# EAGLE board electrobassrev6 (EAGLE 9.6.2), part 1 of 2
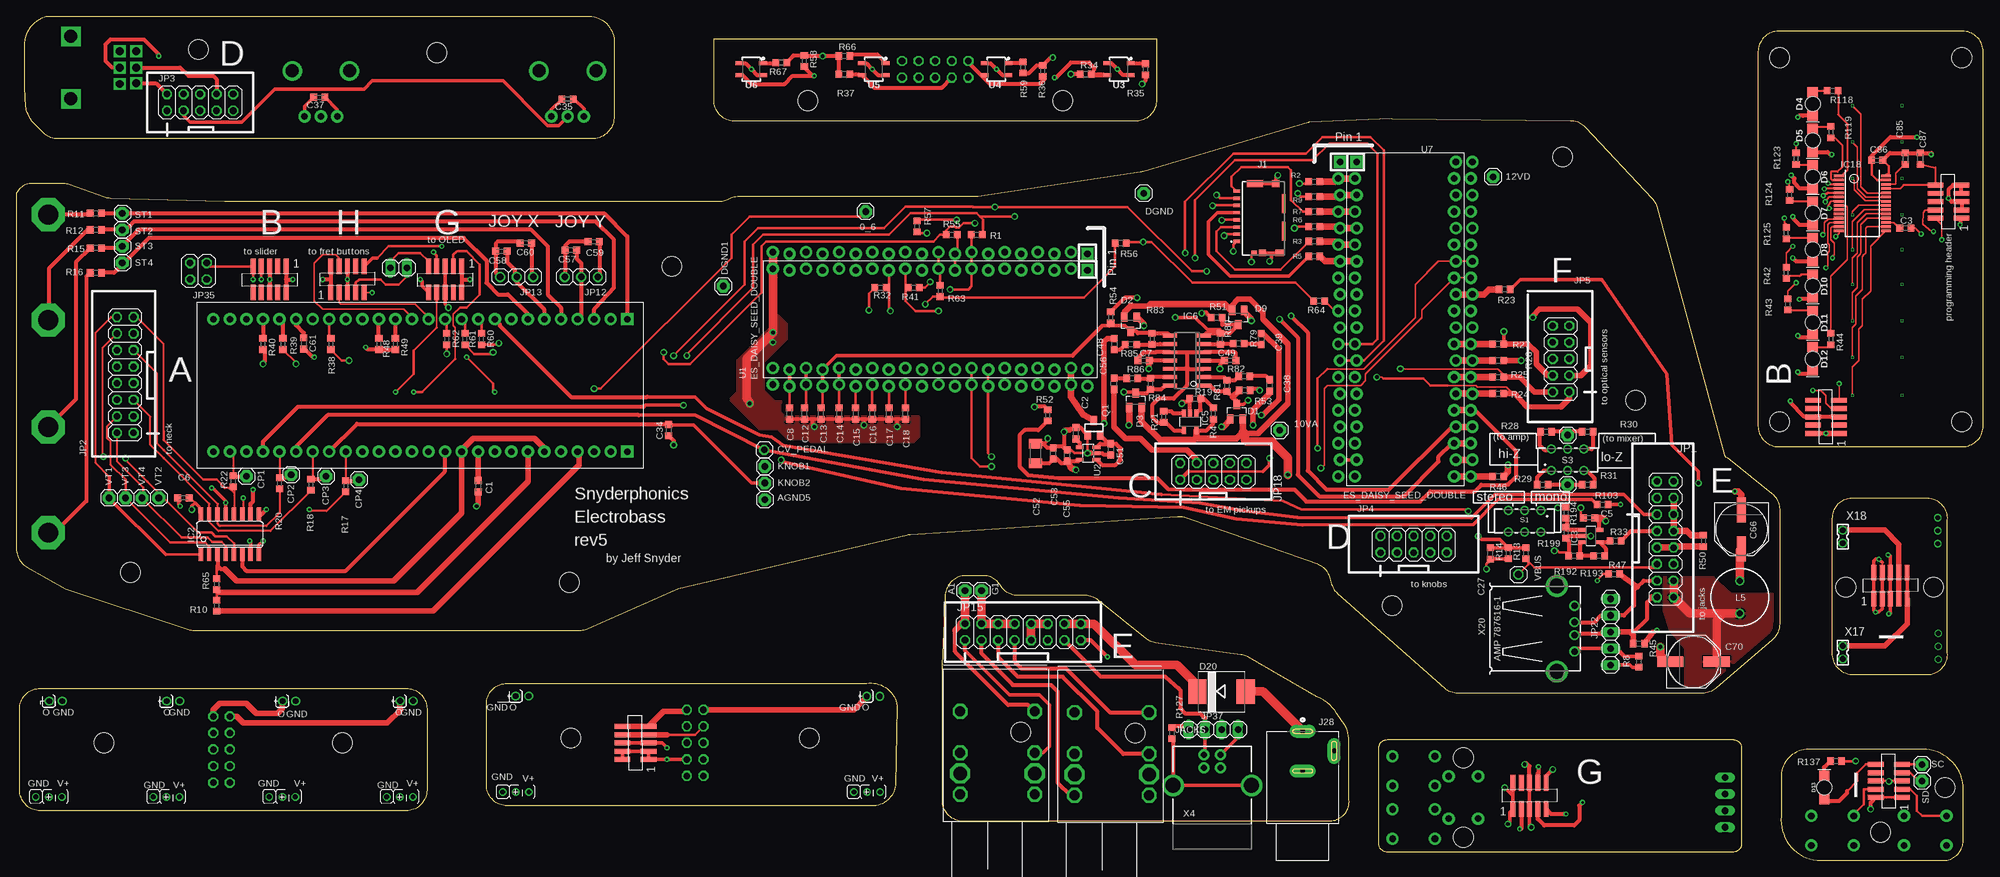
[diagram p0: board, top side]
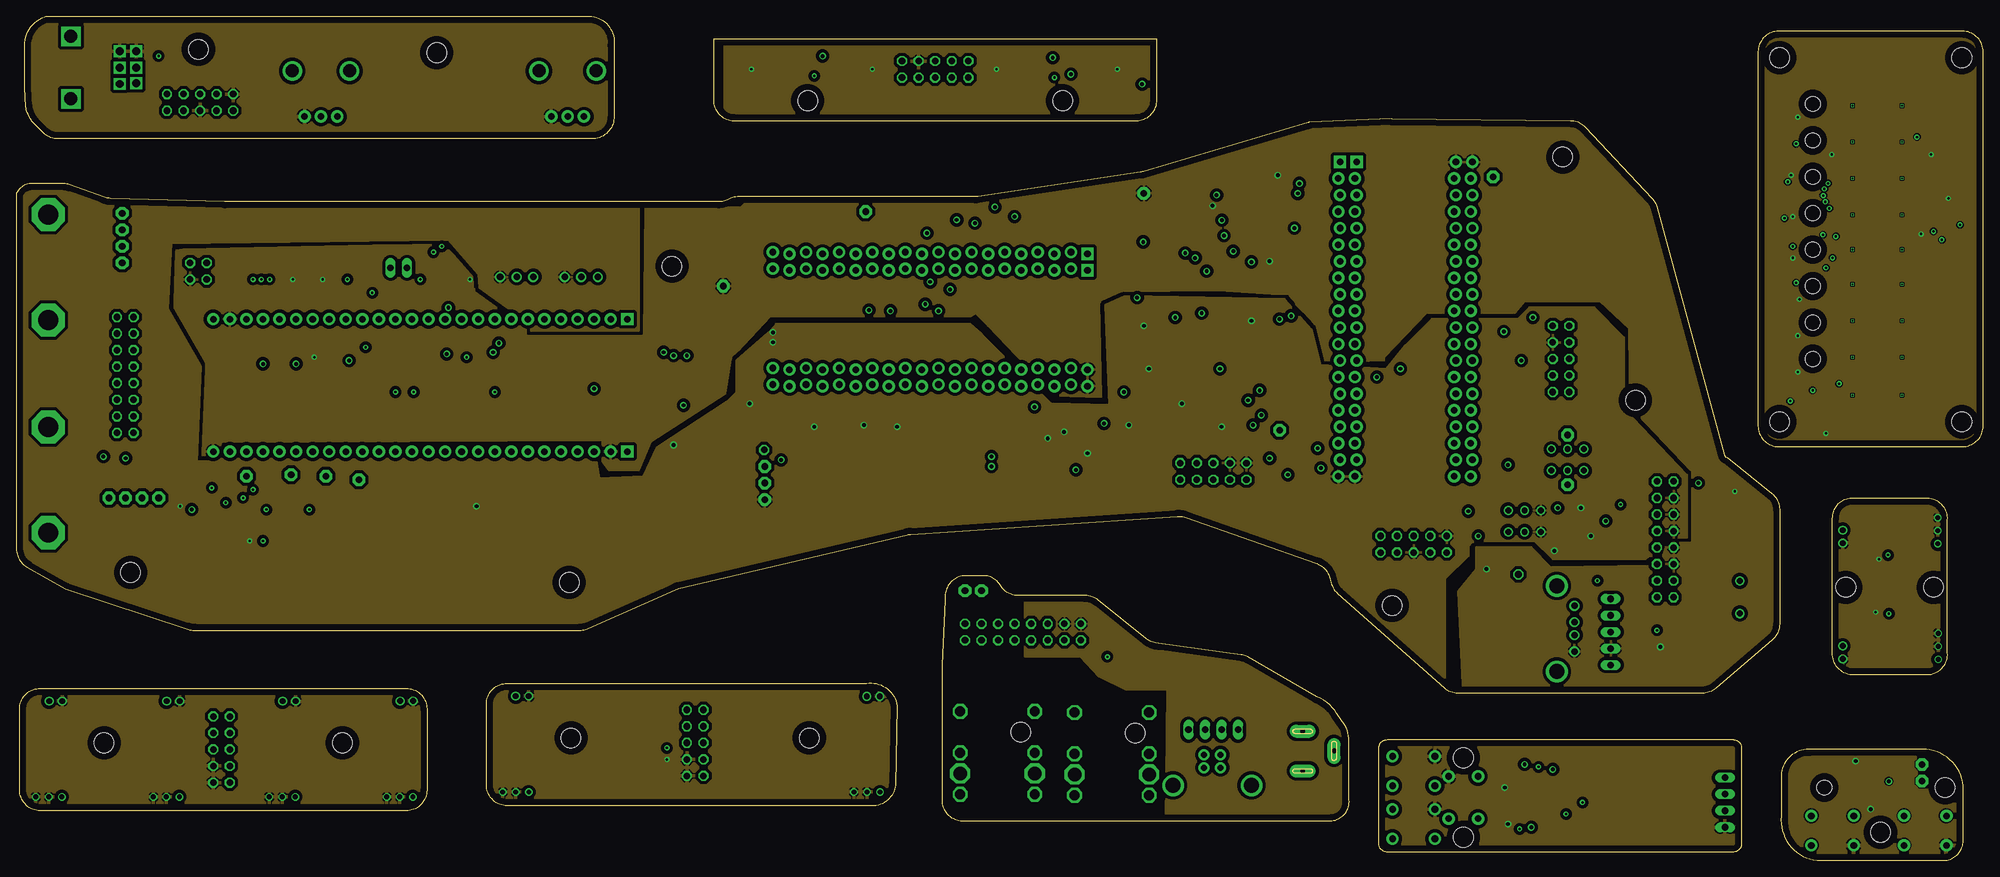
[diagram p1: board, inner layer Route2]
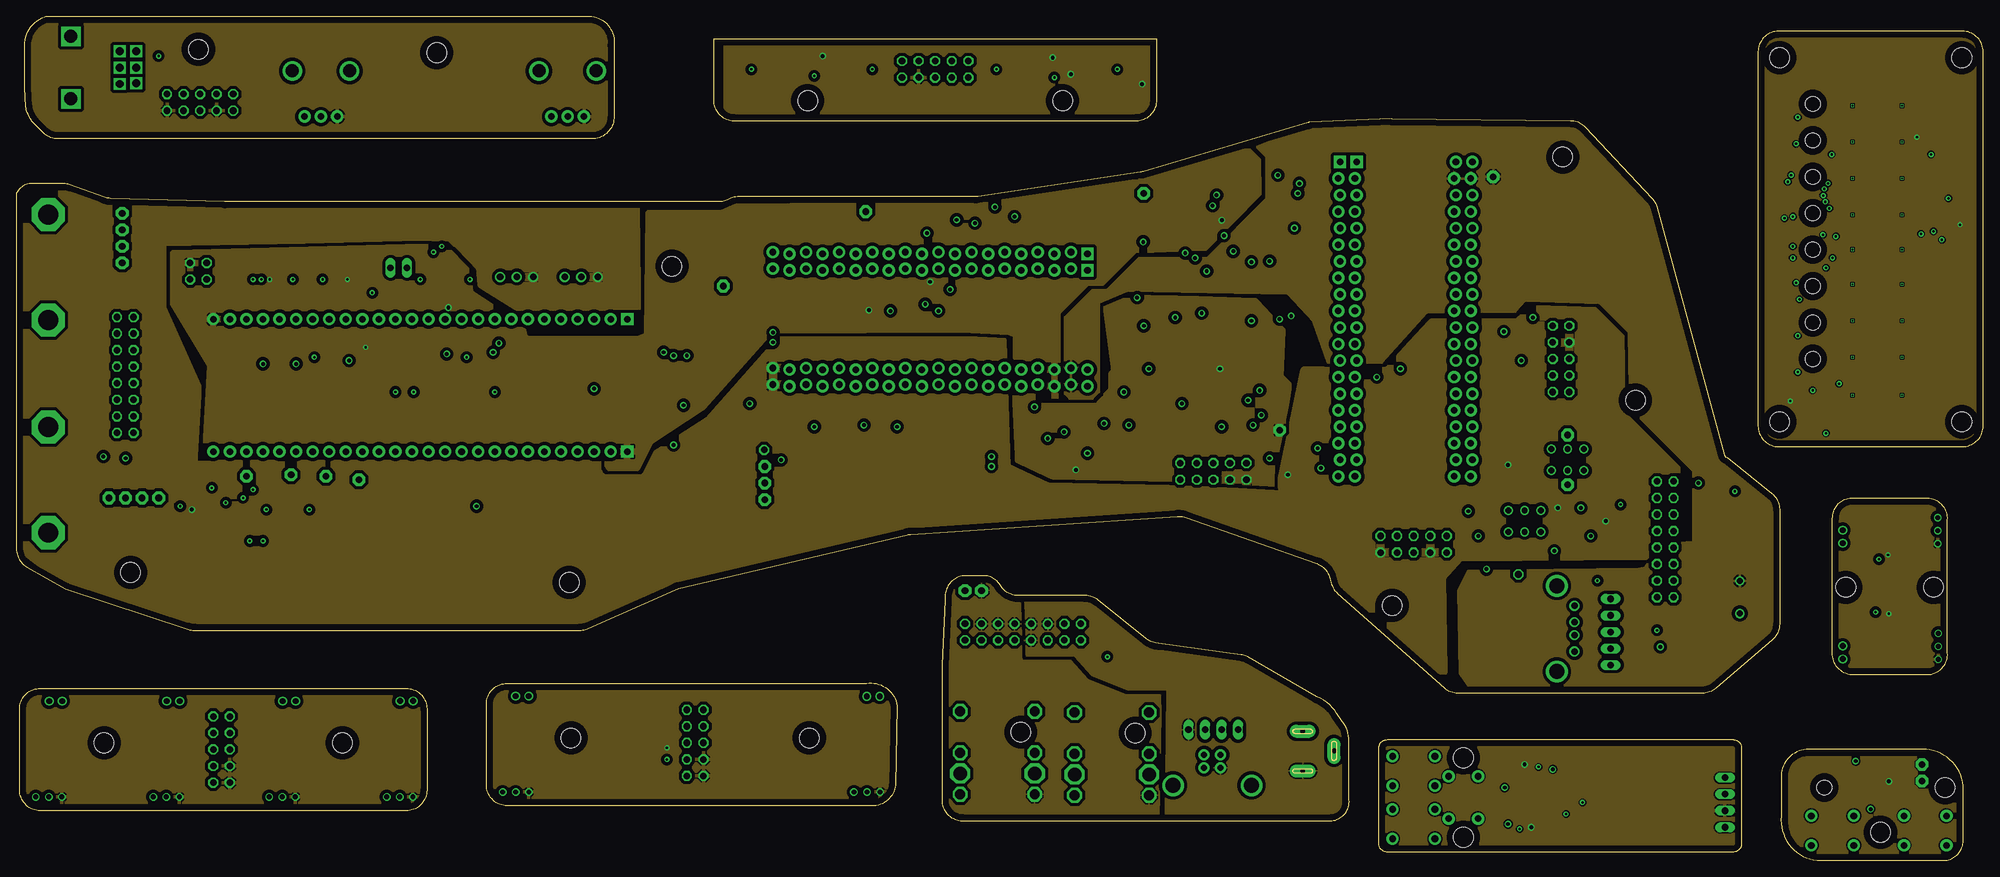
[diagram p2: board, inner layer Route15]
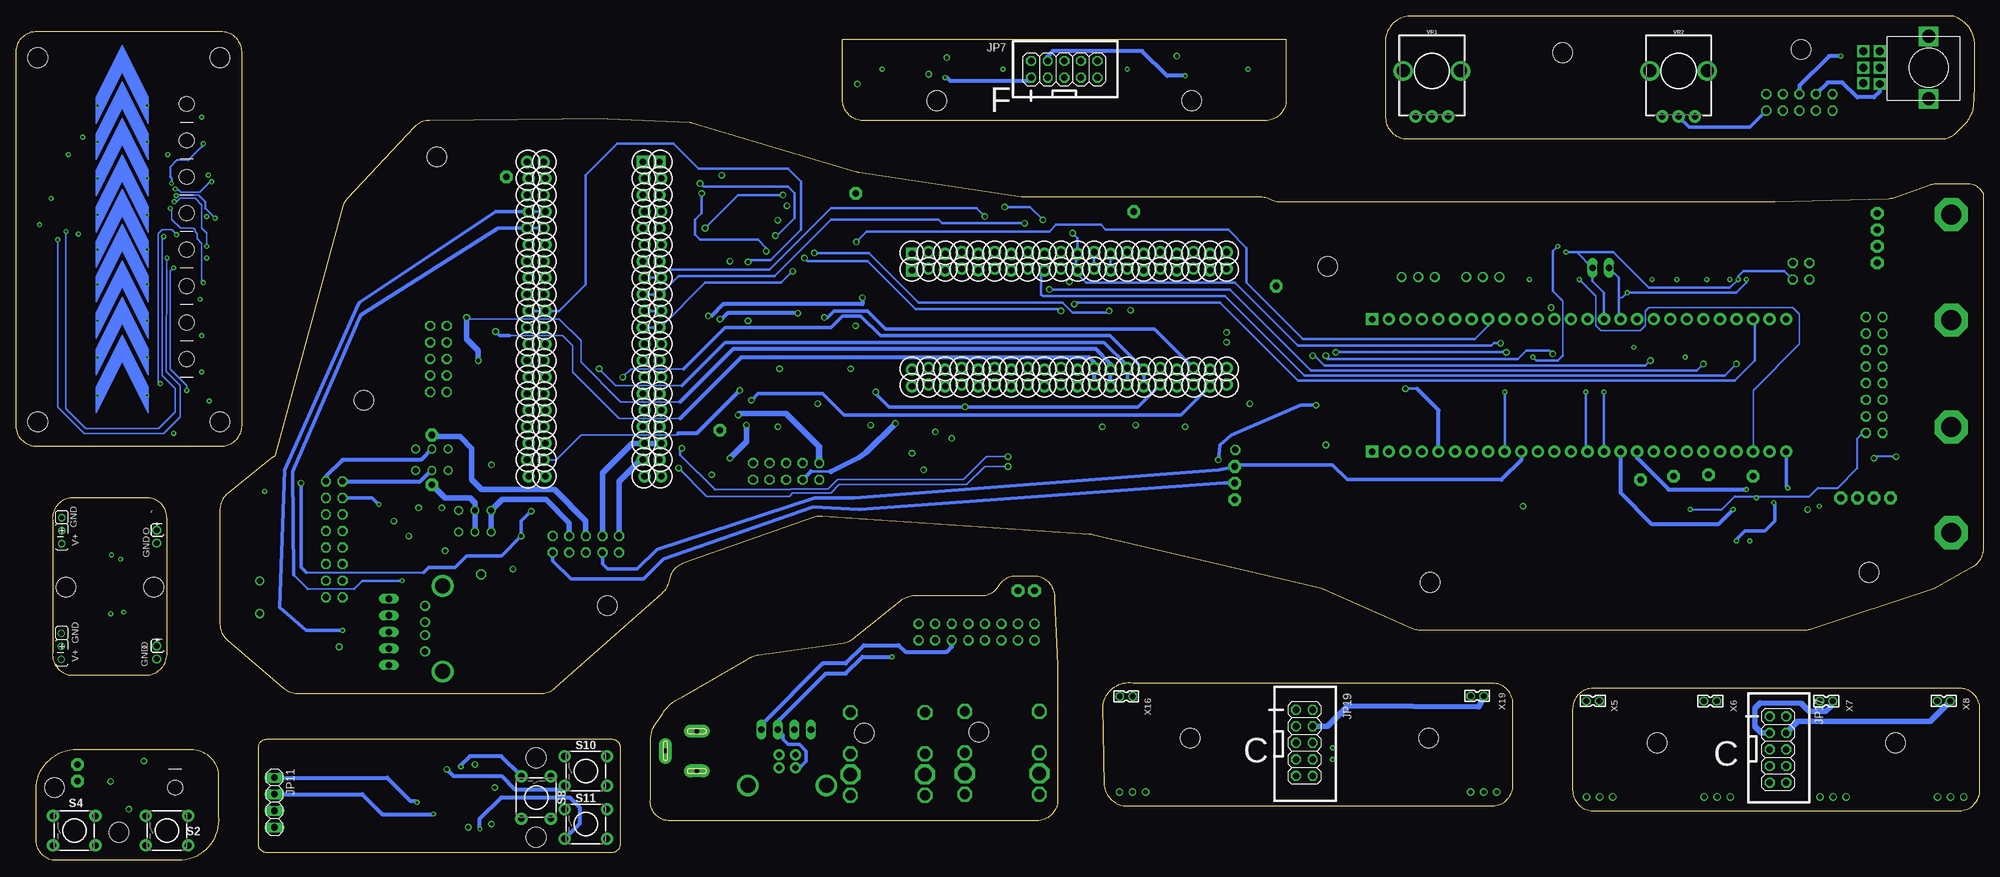
[diagram p3: board, bottom side, seen from below]

Size 301.75 x 129.54 mm. Coordinates in mm from the lower left corner, seen from the top.
Outline: 0,102.36 0,47.82 arc60 1.61,45.06 7.62,41.66 26.44,35.46 arc18 27.43,35.31 86.45,35.31 arc24 87.74,35.58 101.07,41.53 arc-11 101.64,41.73 136.64,49.98 arc-10 137.18,50.05 178.16,52.79 arc-23 179.43,52.62 199.52,45.54 arc-58 201.56,43.26 201.7,42.64 arc35 202.69,40.98 219.06,26.45 arc42 221.17,25.65 258.67,25.65 arc41 260.73,26.42 269.4,33.85 arc49 270.51,36.26 270.51,53.85 arc51 269.33,56.33 262.9,61.51 arc12 262.33,61.88 arc-48 262.07,62.19 251.67,100.33 arc28 250.92,101.67 240.7,112.55 arc46 238.42,113.55 211.07,113.79 198.37,113.28 arc-9 198.13,113.21 172.93,105.73 arc-8 172.5,105.63 147.55,101.89 arc-9 147.08,101.85 110.89,101.85 arc23 109.64,101.6 109.06,101.35 arc-23 107.81,101.09 32,101.09 14.48,101.59 arc-18 13.49,101.77 8.14,103.7 arc20 7.07,103.89 2.47,103.89 arc63 0,102.36
Outline: 298.58,127.25 270.38,127.25 arc90 267.21,124.08 267.21,66.67 arc90 270.38,63.5 298.58,63.5 arc90 301.75,66.67 301.75,124.08 arc90 298.58,127.25
Outline: 291.85,17.02 275,17.02 arc90 270.76,13.03 270.76,6.78 arc90 276.27,0 295.66,0 arc90 298.7,3.05 298.7,11.43 arc90 291.85,17.02
Outline: 110.11,113.54 171.83,113.54 arc90 175.01,116.71 175.01,125.98 106.93,125.98 106.93,116.71 arc90 110.11,113.54
Outline: 4.62,129.52 88.27,129.54 arc-90 91.69,125.09 91.69,113.92 arc-90 88.27,110.74 6.39,110.74 arc-45 4.15,111.67 2.65,113.17 arc-18 2.06,114 1.81,114.5 arc-22 1.48,115.69 1.27,118.62 1.27,125.03 arc-70 4.38,129.49 4.53,129.53 arc-20 4.62,129.52
Outline: 210.31,18.54 263.4,18.54 arc-90 264.67,17.27 264.67,2.54 arc-90 263.4,1.27 210.31,1.27 arc-90 209.04,2.54 209.04,17.27 arc-90 210.31,18.54
Outline: 142.49,39.88 141.99,29.97 141.99,9.27 arc90 145.16,6.1 201.8,6.1 arc90 204.47,9.27 204.47,18.27 arc28 203.85,20.76 202.63,22.52 arc34 199.56,25.1 188.98,31.21 arc21 187.89,31.57 175.26,33.27 174.75,33.38 arc-27 173.39,34.01 165.97,39.94 arc39 163.99,40.64 153.72,40.64 arc-60 150.97,42.22 arc60 148.41,43.69 145.67,43.69 arc90 142.49,40.51 142.49,39.88
Outline: 130.94,8.38 75.31,8.38 arc-90 72.14,11.56 72.14,24 arc-90 75.31,27.18 130.43,27.18 arc-90 135.13,23.75 134.87,11.56 arc-90 130.94,8.38
Outline: 278.64,32.13 278.64,52.45 arc-90 281.56,55.63 293.5,55.63 arc-90 296.16,51.94 296.16,32.13 arc-90 293.5,28.45 281.56,28.45 arc-90 278.64,32.13
Outline: 59.82,7.62 3.68,7.62 arc-90 0.51,10.79 0.51,23.24 arc-90 3.68,26.42 59.82,26.42 arc-90 62.99,23.24 62.99,10.79 arc-90 59.82,7.62
Copper layers (1+2*15+16): Top 0.035mm / dielectric 1.5mm / Route2 0.035mm / dielectric 0.15mm / Route15 0.035mm / dielectric 0.2mm / Bottom 0.035mm
Design rules "default *": minimum track width 8mil, minimum drill 12mil, track to track 8mil, track to pad 8mil, pad to pad 8mil, via to via 8mil, smd to smd 8mil, copper to edge 40mil, drill to drill 8mil, minimum pad ring 1mil, minimum via ring 8mil, stop-mask expansion 1mil, vias tented up to drill 0mil, thermal gap 10mil
Holes 3.05 mm at 84.84,42.67 17.53,44.2 100.58,91.19 211.07,39.12 237.24,107.95 248.41,70.61 298.45,123.19 298.45,67.31 270.51,67.31 270.51,123.19 286,4.32 295.91,11.18 121.41,116.59 160.53,116.59 64.52,123.95 27.94,124.46 222,15.75 222,3.56 85.09,18.8 121.67,18.8 294.13,41.91 280.67,41.91 13.46,18.03 50.04,18.03

## Footprints (pad centres in the part's own frame; a part is rotated, then mirrored left to right if it is on the bottom)
1X01 = drill 1.016 pad 1.93 octagon: 1 0,0
C0603K = smd 1.05 x 1.08: 1 -0.875,0; 2 0.875,0
C0603 = smd 1.1 x 1: 1 -0.85,0; 2 0.85,0
C1206K = smd 1.5 x 2: 1 -1.5,0; 2 1.5,0
PANASONIC_E = smd 3.8 x 1.4: + 3,0; - -3,0
PANASONIC_F = smd 4 x 1.6: + 3.55,0; - -3.55,0
1X01' = drill 1.016 octagon: 1 0,0
SOT23 = smd 1 x 1.4: 1 -0.95,-1.1; 2 0.95,-1.1; 3 0,1.1
LED-1206-BOTTOM = smd 1.5 x 1.6: A -1.8,0; C 1.8,0 | hole 2.3: 0,0
SMC = smd 2.8 x 3.8: A 3.7,0; C -3.7,0
SO16 = smd 0.66 x 2.032: 1 -4.445,-3.073; 2 -3.175,-3.073; 3 -1.905,-3.073; 4 -0.635,-3.073; 5 0.635,-3.073; 6 1.905,-3.073; 7 3.175,-3.073; 8 4.445,-3.073; 9 4.445,3.073; 10 3.175,3.073; 11 1.905,3.073; 12 0.635,3.073; 13 -0.635,3.073; 14 -1.905,3.073; 15 -3.175,3.073; 16 -4.445,3.073
SOT23-5 = smd 0.6 x 1.2: 1 -0.95,-1.306; 2 0,-1.306; 3 0.95,-1.306; 4 0.95,1.306; 5 -0.95,1.306
SO14 = smd 0.6 x 2.2: 1 -3.81,-2.6; 2 -2.54,-2.6; 3 -1.27,-2.6; 4 0,-2.6; 5 1.27,-2.6; 6 2.54,-2.6; 7 3.81,-2.6; 8 3.81,2.6; 9 2.54,2.6; 10 1.27,2.6; 11 0,2.6; 12 -1.27,2.6; 13 -2.54,2.6; 14 -3.81,2.6
SSOP28 = smd 0.4 x 1.5: 1 -4.225,-3.625; 2 -3.575,-3.625; 3 -2.925,-3.625; 4 -2.275,-3.625; 5 -1.625,-3.625; 6 -0.975,-3.625; 7 -0.325,-3.625; 8 0.325,-3.625; 9 0.975,-3.625; 10 1.625,-3.625; 11 2.275,-3.625; 12 2.925,-3.625; 13 3.575,-3.625; 14 4.225,-3.625; 15 4.225,3.625; 16 3.575,3.625; 17 2.925,3.625; 18 2.275,3.625; 19 1.625,3.625; 20 0.975,3.625; 21 0.325,3.625; 22 -0.325,3.625; 23 -0.975,3.625; 24 -1.625,3.625; 25 -2.275,3.625; 26 -2.925,3.625; 27 -3.575,3.625; 28 -4.225,3.625
105162-0001 = smd 0.5 x 1: 1 3.55,-7.34; 2 2.45,-7.34; 3 1.35,-7.34; 4 0.25,-7.34; 5 -0.85,-7.34; 6 -1.95,-7.34; 7 -3.05,-7.34; 8 -4.15,-7.34 | smd 0.72 x 0.78: 9 5.31,-4.66 | smd 1.05 x 1.08: 10 5.325,-3.39 | smd 1.05 x 1.2: 11 5.325,-0.78; 12 -5.325,-1.35 | smd 1.05 x 2.39: 13 -5.325,-4.535 | smd 2.91 x 0.55: 14 1.986,-0.105; 15 -2.204,-0.105
CUI_PJ-066A = drill 0.7 pad 2 long: 1 0,0; 2 6.1,0; 3 3,4.8
2X08 = drill 1.016 octagon: 1 -8.89,-1.27; 2 -8.89,1.27; 3 -6.35,-1.27; 4 -6.35,1.27; 5 -3.81,-1.27; 6 -3.81,1.27; 7 -1.27,-1.27; 8 -1.27,1.27; 9 1.27,-1.27; 10 1.27,1.27; 11 3.81,-1.27; 12 3.81,1.27; 13 6.35,-1.27; 14 6.35,1.27; 15 8.89,-1.27; 16 8.89,1.27
2X05 = drill 1.016 octagon: 1 -5.08,-1.27; 2 -5.08,1.27; 3 -2.54,-1.27; 4 -2.54,1.27; 5 0,-1.27; 6 0,1.27; 7 2.54,-1.27; 8 2.54,1.27; 9 5.08,-1.27; 10 5.08,1.27
20021121 = smd 0.76 x 2.4: 1 -2.54,-2; 2 -2.54,2; 3 -1.27,-2; 4 -1.27,2; 5 0,-2; 6 0,2; 7 1.27,-2; 8 1.27,2; 9 2.54,-2; 10 2.54,2
1X04 = drill 1.016 long: 1 -3.81,0; 2 -1.27,0; 3 1.27,0; 4 3.81,0
1X03 = drill 1.016: 1 -2.54,0; 2 0,0; 3 2.54,0
1X05 = drill 1.016 long: 1 -5.08,0; 2 -2.54,0; 3 0,0; 4 2.54,0; 5 5.08,0
1X02 = drill 1.016 long: 1 -1.27,0; 2 1.27,0
2X02 = drill 1.016 octagon: 1 -1.27,-1.27; 2 -1.27,1.27; 3 1.27,-1.27; 4 1.27,1.27
6000-XXXX-RC = drill 0.9 pad 1.422: 1 -2.5,0; 2 2.5,0
SUPER-SOT3 = smd 1 x 1.4: 1 -0.95,-1.1; 2 0.95,-1.1; 3 0,1.1
R0603 = smd 1 x 1.1: 1 -0.85,0; 2 0.85,0
452404020202 = drill 0.9: 1 2.5,1.65; 2 0,1.65; 3 -2.5,1.65; 4 2.5,-1.65; 5 0,-1.65; 6 -2.5,-1.65
TACTILE_SWITCH_PTH_6.0MM = drill 1.016 pad 1.88: 1 -3.251,2.261; 2 3.251,2.261; 3 -3.251,-2.261; 4 3.251,-2.261
ES_DAISY_SEED_DOUBLE = drill 1.016 pad 1.88 square: 1 -7.493,24.13; B1 -10.033,24.13 | drill 1.016 pad 1.88: 2 -7.747,21.59; 3 -7.493,19.05; 4 -7.747,16.51; 5 -7.493,13.97; 6 -7.747,11.43; 7 -7.493,8.89; 8 -7.747,6.35; 9 -7.493,3.81; 10 -7.747,1.27; 11 -7.493,-1.27; 12 -7.747,-3.81; 13 -7.493,-6.35; 14 -7.747,-8.89; 15 -7.493,-11.43; 16 -7.747,-13.97; 17 -7.493,-16.51; 18 -7.747,-19.05; 19 -7.493,-21.59; 20 -7.747,-24.13; 21 7.493,-24.13; 22 7.747,-21.59; 23 7.493,-19.05; 24 7.747,-16.51; 25 7.493,-13.97; 26 7.747,-11.43; 27 7.493,-8.89; 28 7.747,-6.35; 29 7.493,-3.81; 30 7.747,-1.27; 31 7.493,1.27; 32 7.747,3.81; 33 7.493,6.35; 34 7.747,8.89; 35 7.493,11.43; 36 7.747,13.97; 37 7.493,16.51; 38 7.747,19.05; 39 7.493,21.59; 40 7.747,24.13; B2 -10.287,21.59; B3 -10.033,19.05; B4 -10.287,16.51; B5 -10.033,13.97; B6 -10.287,11.43; B7 -10.033,8.89; B8 -10.287,6.35; B9 -10.033,3.81; B10 -10.287,1.27; B11 -10.033,-1.27; B12 -10.287,-3.81; B13 -10.033,-6.35; B14 -10.287,-8.89; B15 -10.033,-11.43; B16 -10.287,-13.97; B17 -10.033,-16.51; B18 -10.287,-19.05; B19 -10.033,-21.59; B20 -10.287,-24.13; B21 10.033,-24.13; B22 10.287,-21.59; B23 10.033,-19.05; B24 10.287,-16.51; B25 10.033,-13.97; B26 10.287,-11.43; B27 10.033,-8.89; B28 10.287,-6.35; B29 10.033,-3.81; B30 10.287,-1.27; B31 10.033,1.27; B32 10.287,3.81; B33 10.033,6.35; B34 10.287,8.89; B35 10.033,11.43; B36 10.287,13.97; B37 10.033,16.51; B38 10.287,19.05; B39 10.033,21.59; B40 10.287,24.13
SOT25 = smd 0.55 x 1.2: 1 -0.95,-1.3; 2 0,-1.3; 3 0.95,-1.3; 4 0.95,1.3; 5 -0.95,1.3
QRE1113 = smd 1.2 x 0.6: 1 -1.8,-0.9; 2 1.8,-0.9; 3 1.8,0.9; 4 -1.8,0.9
SLIDERS_SLIDER-SEGMENT3 = drill 0.254 pad 0.406 square: P$1 -1.27,3.81; P$2 -1.27,-3.81
PN092 = drill 2 square: P$1 -4.8,0; P$2 4.8,0 | drill 1.2 square: P$3 -2.5,-7.5; P$4 0,-7.5; P$5 2.5,-7.5; P$6 -2.5,-10; P$7 0,-10; P$8 2.4,-10
CY8CKIT-059_TARGET_3 = drill 1.016 pad 1.876 square: 1 30.48,8.89; 27 30.48,-11.43 | drill 1.016 pad 1.876: 2 27.94,8.89; 3 25.4,8.89; 4 22.86,8.89; 5 20.32,8.89; 6 17.78,8.89; 7 15.24,8.89; 8 12.7,8.89; 9 10.16,8.89; 10 7.62,8.89; 11 5.08,8.89; 12 2.54,8.89; 13 0,8.89; 14 -2.54,8.89; 15 -5.08,8.89; 16 -7.62,8.89; 17 -10.16,8.89; 18 -12.7,8.89; 19 -15.24,8.89; 20 -17.78,8.89; 21 -20.32,8.89; 22 -22.86,8.89; 23 -25.4,8.89; 24 -27.94,8.89; 25 -30.48,8.89; 26 -33.02,8.89; 28 27.94,-11.43; 29 25.4,-11.43; 30 22.86,-11.43; 31 20.32,-11.43; 32 17.78,-11.43; 33 15.24,-11.43; 34 12.7,-11.43; 35 10.16,-11.43; 36 7.62,-11.43; 37 5.08,-11.43; 38 2.54,-11.43; 39 0,-11.43; 40 -2.54,-11.43; 41 -5.08,-11.43; 42 -7.62,-11.43; 43 -10.16,-11.43; 44 -12.7,-11.43; 45 -15.24,-11.43; 46 -17.78,-11.43; 47 -20.32,-11.43; 48 -22.86,-11.43; 49 -25.4,-11.43; 50 -27.94,-11.43; 51 -30.48,-11.43; 52 -33.02,-11.43
STRING_HOLDER = drill 3.048 pad 5.08 octagon: P$1 0,0
POT-PTH-ALPS-KIT = drill 1 pad 1.88: P$1 7,-2.5; P$2 7,0; P$3 7,2.5 | drill 2: P$4 0,-4.4; P$5 0,4.4
3P-2MM-TH = drill 0.75: P$1 -2,0; P$2 0,0; P$3 2,0
NRJ6HF2 = drill 2.057 octagon: POST1 -7.442,0; POST2 -7.442,-11.43 | drill 1.524 octagon: R -10.6,0; RN -10.6,-11.43; S -4.25,0; SN -4.25,-11.43; T -16.942,0; TN -16.942,-11.43 | hole 2.997: -13.792,-2.134
USB-B-PTH = drill 0.914 pad 1.676: D+ 0,1.25; D- 1.981,1.25; GND 0,-1.25; VBUS 1.981,-1.25 | drill 2.286: S1 -2.718,-6.02; S2 -2.718,6.02
332-02 = drill 0.9 pad 1.27: 1 0,-1; 2 0,1
GHI2_USB_HOST_HORIZONTAL_W/CHASSIS_GND = drill 1: 1 -3.5,12.99; 2 -1,12.99; 3 1,12.99; 4 3.5,12.99 | drill 2.3: 5 -6.57,10.28; 6 6.57,10.28

## Placement (x,y rotation side)
0_6  [1X01]  130.3,99.57 180 top
10VA  [1X01]  193.8,66.04 90 top
12VD  [1X01]  226.57,104.9 270 top
A1  [1X01]  145.54,41.4 0 top
AGND5  [1X01]  114.81,55.37 0 top
AUDIO_OUT_L_POSTVOL  [1X01]  238,65.28 0 top
AUDIO_OUT_R_POSTVOL  [1X01]  238,57.66 0 top
C1  .01uf  [C0603K]  70.87,57.4 270 top
C2  .01uf  [C0603K]  162.56,65.53 90 top
C3  2200pf  [C0603K]  289.81,97.03 0 top
C5  .1uf  [C0603K]  241.3,52.58 180 top
C6  .1uf  [C0603K]  25.65,55.63 180 top
C7  .1uf  [C0603K]  172.97,76.71 0 top
C8  .01uf  [C0603K]  118.62,68.58 270 top
C12  .01uf  [C0603K]  120.9,68.58 270 top
C13  .01uf  [C0603K]  123.44,68.58 270 top
C14  .01uf  [C0603K]  126.24,68.58 270 top
C15  .01uf  [C0603K]  128.78,68.58 270 top
C16  .01uf  [C0603K]  131.32,68.58 270 top
C17  .01uf  [C0603K]  133.86,68.58 270 top
C18  .01uf  [C0603K]  136.4,68.58 270 top
C27  .1uf  [C0603K]  226.12,47.1 270 top
C34  .01uf  [C0603K]  100.08,66.04 270 top
C35  .1uf  [C0603K]  84.58,116.84 180 top
C37  .1uf  [C0603K]  46.48,117.09 180 top
C38  1uf  [C0603]  192.28,72.9 90 top
C39  1uf  [C0603]  191.01,80.01 270 top
C48  1uf  [C0603]  168.4,79.25 270 top
C49  .1uf  [C0603K]  186.21,76.74 0 top
C51  1uf  [C0603]  167.93,63.09 270 top
C52  10uf  [C1206K]  156.37,62.45 90 top
C53  1uf  [C0603]  159.1,62.45 90 top
C55  .001uf  [C0603]  161.26,62.13 90 top
C56  1uf  [C0603]  168.4,73.15 90 top
C57  .01uf  [C0603K]  85.09,93.66 180 top
C58  .01uf  [C0603K]  74.42,93.47 180 top
C59  .1uf  [C0603K]  88.58,94.93 180 top
C60  .1uf  [C0603K]  78.17,94.74 180 top
C61  2200pf  [C0603K]  44.09,79.32 270 top
C66  47uf  [PANASONIC_E]  264.67,50.8 270 top
C70  100uf  [PANASONIC_F]  257.3,30.48 0 top
C85  .1uf  [C0603K]  289.81,107.7 90 top
C86  .1uf  [C0603K]  285.5,107.44 0 top
C87  .1uf  [C0603K]  292.1,107.7 90 top
CP1  [1X01]  35.31,58.93 0 top
CP2  [1X01]  42.16,59.18 0 top
CP3  [1X01]  47.5,58.93 0 top
CP4  [1X01]  52.58,58.42 0 top
CV_PEDAL  [1X01']  114.74,62.99 0 top
D1  BAT54S  [SOT23]  187.2,68.83 0 top
D2  BAT54S  [SOT23]  170.94,82.3 180 top
D3  BAT54S  [SOT23]  171.7,70.61 0 top
D4  [LED-1206-BOTTOM]  275.59,116.08 270 top
D5  [LED-1206-BOTTOM]  275.59,110.49 270 top
D6  [LED-1206-BOTTOM]  275.59,104.9 270 top
D7  [LED-1206-BOTTOM]  275.59,99.31 270 top
D8  [LED-1206-BOTTOM]  275.59,93.73 270 top
D9  BAT54S  [SOT23]  187.45,83.31 180 top
D10  [LED-1206-BOTTOM]  275.59,88.14 270 top
D11  [LED-1206-BOTTOM]  275.59,82.55 270 top
D12  [LED-1206-BOTTOM]  275.59,76.96 270 top
D13  [LED-1206-BOTTOM]  277.37,11.18 90 top
D20  MBRS340T3  [SMC]  184.91,25.91 0 top
DGND  [1X01]  172.97,102.36 270 top
DGND1  [1X01]  108.46,88.14 90 top
G1  [1X01]  148.08,41.4 0 top
IC2  4052D  [SO16]  32.77,50.04 0 top
IC3  LMV321M5  [SOT23-5]  241.55,49.78 270 top
IC5  LMV321M5  [SOT23-5]  180.09,67.31 180 top
IC6  LM324D  [SO14]  179.58,76.71 90 top
IC18  CY8C4124  [SSOP28]  283.21,100.84 270 top
J1  105162-0001  [105162-0001]  194.56,98.55 270 top
J28  PJ-066A  [CUI_PJ-066A]  197.36,19.81 270 top
JP1  [2X08]  252.98,49.28 270 top
JP2  [2X08]  16.71,74.5 90 top
JP3  PINHD-2X5  [2X05]  28.19,116.33 0 top
JP4  PINHD-2X5  [2X05]  214.38,48.51 0 top
JP5  PINHD-2X5  [2X05]  236.98,76.96 90 top
JP6  20021121  [20021121]  277.62,68.07 90 top
JP7  PINHD-2X5  [2X05]  140.97,121.41 0 bottom
JP8  20021121  [20021121]  38.86,89.15 180 top
JP9  20021121  [20021121]  65.79,89.15 180 top
JP10  20021121  [20021121]  232.16,9.91 0 top
JP11  PINHD-1X4  [1X04]  262.13,8.89 270 bottom
JP12  [1X03]  86.68,89.53 180 top
JP13  [1X03]  76.77,89.53 180 top
JP15  [2X08]  154.43,35.05 0 top
JP17  PINHD-2X5  [2X05]  31.5,17.02 270 bottom
JP18  PINHD-2X5  [2X05]  183.64,59.69 0 top
JP19  PINHD-2X5  [2X05]  104.14,18.03 270 bottom
JP20  20021121  [20021121]  287.53,42.16 0 top
JP21  20021121  [20021121]  95,18.03 90 top
JP22  PINHD-1X5  [1X05]  244.6,35.05 270 top
JP23  20021121  [20021121]  50.8,89.15 0 top
JP24  20021121  [20021121]  287.27,12.19 90 top
JP31  [1X02]  58.67,90.93 0 top
JP34  20021121  [20021121]  296.42,101.09 90 top
JP35  [2X02]  27.94,90.42 180 top
JP37  [1X04]  183.64,20.07 0 top
KNOB1  [1X01]  114.81,60.45 0 top
KNOB2  [1X01]  114.81,57.91 0 top
L5  [6000-XXXX-RC]  264.41,40.39 90 top
Q1  DMP3099L  [SUPER-SOT3]  165.32,66.39 0 top
R1  0R_DNP  [R0603]  147.32,96.01 180 top
R2  47R  [R0603]  199.14,104.14 180 top
R3  47R  [R0603]  199.14,95 180 top
R4  10k  [R0603]  183.64,68.58 90 top
R5  47R  [R0603]  199.14,92.71 180 top
R6  47R  [R0603]  199.14,97.28 180 top
R7  47R  [R0603]  199.14,99.57 180 top
R8  0R  [R0603]  248.92,30.48 90 top
R9  47R  [R0603]  199.14,101.85 180 top
R10  0R  [R0603]  30.73,39.12 90 top
R11  0R  [R0603]  12.19,99.31 180 top
R12  0R  [R0603]  12.19,96.77 180 top
R13  33k  [R0603]  231.58,47.12 270 top
R14  68k  [R0603]  228.89,47.12 90 top
R15  0R  [R0603]  12.19,93.98 180 top
R16  0R  [R0603]  12.19,90.17 180 top
R17  0R  [R0603]  50.55,57.4 90 top
R18  0R  [R0603]  45.21,57.66 90 top
R19  10k  [R0603]  180.85,70.87 180 top
R20  0R  [R0603]  40.39,57.91 90 top
R21  1.6k  [R0603]  176.02,68.07 90 top
R22  0R  [R0603]  33.27,58.17 90 top
R23  0R  [R0603]  228.35,87.63 0 top
R24  0R_DNP  [R0603]  227.33,71.63 180 top
R25  0R_DNP  [R0603]  227.33,74.17 0 top
R26  0R_DNP  [R0603]  227.33,76.71 180 top
R27  0R_DNP  [R0603]  227.33,79.25 0 top
R28  10k  [R0603]  234.7,65.79 180 top
R29  10k  [R0603]  234.19,57.66 180 top
R30  47R  [R0603]  241.05,65.79 0 top
R31  47R  [R0603]  241.05,57.66 0 top
R32  1.6k  [R0603]  132.59,87.88 0 top
R33  47R  [R0603]  245.36,49.02 0 top
R34  10k  [R0603]  164.08,120.65 0 top
R35  100R  [R0603]  173.23,121.41 90 top
R36  10k  [R0603]  157.48,121.16 270 top
R37  10k  [R0603]  127,120.65 0 top
R38  47R  [R0603]  48.26,79.25 270 top
R39  47R  [R0603]  40.89,79.25 270 top
R40  47R  [R0603]  37.85,79.25 270 top
R41  1.6k  [R0603]  137.67,87.88 180 top
R42  82R  [R0603]  271.53,90.17 270 top
R43  82R  [R0603]  271.78,85.34 270 top
R44  82R  [R0603]  278.38,80.01 270 top
R45  0R_DNP  [R0603]  248.92,33.27 180 top
R46  0R_DNP  [R0603]  227.33,58.93 180 top
R47  0R_DNP  [R0603]  245.11,43.94 0 top
R48  1.6k  [R0603]  55.63,79.25 270 top
R49  1.6k  [R0603]  58.17,79.25 270 top
R50  0R  [R0603]  258.83,49.02 90 top
R51  0R_DNP  [R0603]  184.15,83.31 0 top
R52  0R_DNP  [R0603]  158.24,68.33 90 top
R53  0R_DNP  [R0603]  188.47,72.14 180 top
R54  0R_DNP  [R0603]  167.89,83.31 270 top
R55  0R_DNP  [R0603]  143.51,96.01 0 top
R56  0R_DNP  [R0603]  169.42,94.74 180 top
R57  0R_DNP  [R0603]  138.18,97.28 270 top
R58  10k  [R0603]  120.9,122.68 270 top
R59  100R  [R0603]  154.43,121.67 90 top
R60  47R  [R0603]  71.37,80.01 270 top
R61  47R  [R0603]  68.83,80.01 270 top
R62  47R  [R0603]  66.04,80.01 270 top
R63  47R  [R0603]  141.73,87.38 270 top
R64  47R  [R0603]  199.9,85.85 180 top
R65  1.6k  [R0603]  30.73,42.42 90 top
R66  100R  [R0603]  127,123.44 0 top
R67  100R  [R0603]  117.35,122.43 180 top
R79  10k  [R0603]  187.52,79.31 180 top
R80  20k  [R0603]  184.72,80.07 90 top
R81  20k  [R0603]  185.74,72.83 270 top
R82  10k  [R0603]  188.4,74.29 0 top
R83  20k  [R0603]  174.24,80.07 90 top
R84  20k  [R0603]  173.99,73.15 270 top
R85  10k  [R0603]  171.01,79.18 180 top
R86  10k  [R0603]  171.2,73.98 180 top
R103  0R  [R0603]  243.33,54.61 180 top
R118  82R  [R0603]  278.64,118.11 180 top
R119  82R  [R0603]  278.38,111.76 90 top
R123  82R  [R0603]  273.05,107.7 270 top
R124  82R  [R0603]  272.03,102.11 270 top
R125  82R  [R0603]  271.53,96.27 270 top
R127  0R  [R0603]  177.29,19.56 90 top
R137  560R  [R0603]  279.15,15.24 0 top
R192  10k  [R0603]  239.01,46.74 0 top
R193  10k  [R0603]  242.82,46.74 180 top
R194  10k  [R0603]  237.74,53.34 90 top
R199  10k  [R0603]  237.74,50.29 90 top
S1  [452404020202]  231.39,52.07 0 top
S2  MOMENTARY-SWITCH-SPST-PTH-6.0MM  [TACTILE_SWITCH_PTH_6.0MM]  278.64,4.57 0 bottom
S3  [452404020202]  238,61.47 180 top
S4  MOMENTARY-SWITCH-SPST-PTH-6.0MM  [TACTILE_SWITCH_PTH_6.0MM]  292.86,4.57 0 bottom
S8  MOMENTARY-SWITCH-SPST-PTH-6.0MM  [TACTILE_SWITCH_PTH_6.0MM]  222,9.65 270 bottom
S10  MOMENTARY-SWITCH-SPST-PTH-6.0MM  [TACTILE_SWITCH_PTH_6.0MM]  214.38,13.72 0 bottom
S11  MOMENTARY-SWITCH-SPST-PTH-6.0MM  [TACTILE_SWITCH_PTH_6.0MM]  214.38,5.59 0 bottom
SC  [1X01]  292.35,14.73 0 top
SD  [1X01]  292.35,12.19 0 top
ST1  [1X01]  16.26,99.31 0 top
ST2  [1X01]  16.26,96.77 0 top
ST3  [1X01]  16.26,94.23 0 top
ST4  [1X01]  16.26,91.69 0 top
U1  ES_DAISY_SEED_DOUBLE  [ES_DAISY_SEED_DOUBLE]  140.21,83.06 270 top
U2  LP2985  [SOT25]  164.43,62.45 90 top
U3  [QRE1113]  169.16,121.41 180 top
U4  [QRE1113]  150.37,121.41 180 top
U5  [QRE1113]  131.57,121.41 180 top
U6  [QRE1113]  112.78,121.41 180 top
U7  ES_DAISY_SEED_DOUBLE  [ES_DAISY_SEED_DOUBLE]  213.11,83.06 0 top
U$1  SLIDER_SEGMENT  [SLIDERS_SLIDER-SEGMENT3]  285.5,117.09 90 bottom
U$2  PN092  [PN092]  8.38,121.67 270 bottom
U$5  SLIDER_SEGMENT  [SLIDERS_SLIDER-SEGMENT3]  285.5,111.51 90 bottom
U$7  CY8CKIT-059_TARGET_3  [CY8CKIT-059_TARGET_3]  63.25,74.17 0 top
U$11  SLIDER_SEGMENT  [SLIDERS_SLIDER-SEGMENT3]  285.5,105.92 90 bottom
U$12  SLIDER_SEGMENT  [SLIDERS_SLIDER-SEGMENT3]  285.5,100.33 90 bottom
U$13  SLIDER_SEGMENT  [SLIDERS_SLIDER-SEGMENT3]  285.5,95 90 bottom
U$14  SLIDER_SEGMENT  [SLIDERS_SLIDER-SEGMENT3]  285.5,89.66 90 bottom
U$15  STRING_HOLDER  [STRING_HOLDER]  4.89,82.93 0 top
U$16  STRING_HOLDER  [STRING_HOLDER]  4.89,99.12 0 top
U$18  SLIDER_SEGMENT  [SLIDERS_SLIDER-SEGMENT3]  285.5,84.07 90 bottom
U$19  SLIDER_SEGMENT  [SLIDERS_SLIDER-SEGMENT3]  285.5,78.49 90 bottom
U$20  SLIDER_SEGMENT  [SLIDERS_SLIDER-SEGMENT3]  285.5,72.64 90 bottom
U$68  STRING_HOLDER  [STRING_HOLDER]  4.89,66.48 0 top
U$69  STRING_HOLDER  [STRING_HOLDER]  4.89,50.29 0 top
VBUS  [1X01']  230.44,43.88 0 top
VR1  B100k  [POT-PTH-ALPS-KIT]  84.58,121.16 270 bottom
VR2  B100k  [POT-PTH-ALPS-KIT]  46.74,121.16 270 bottom
VT1  [1X01]  14.22,55.63 0 top
VT2  [1X01]  21.84,55.63 0 top
VT3  [1X01]  16.76,55.63 0 top
VT4  [1X01]  19.3,55.63 0 top
X1  3P-2MM-TH-MALE  [3P-2MM-TH]  130.51,10.49 180 bottom
X2  NRJ6HF2  [NRJ6HF2]  156.24,5.91 270 top
X3  NRJ6HF2  [NRJ6HF2]  173.8,5.75 270 top
X4  USB+SHIELD  [USB-B-PTH]  183.48,14.22 90 top
X5  332-02  [332-02]  59.88,24.46 90 bottom
X6  332-02  [332-02]  41.85,24.44 90 bottom
X7  332-02  [332-02]  24.07,24.44 90 bottom
X8  332-02  [332-02]  6.03,24.46 90 bottom
X9  3P-2MM-TH-MALE  [3P-2MM-TH]  58.84,9.74 180 bottom
X10  3P-2MM-TH-MALE  [3P-2MM-TH]  40.81,9.74 180 bottom
X11  3P-2MM-TH-MALE  [3P-2MM-TH]  23.03,9.74 180 bottom
X12  3P-2MM-TH-MALE  [3P-2MM-TH]  4.99,9.74 180 bottom
X13  3P-2MM-TH-MALE  [3P-2MM-TH]  294.87,32.84 270 bottom
X14  3P-2MM-TH-MALE  [3P-2MM-TH]  294.79,50.6 270 bottom
X15  3P-2MM-TH-MALE  [3P-2MM-TH]  76.63,10.49 180 bottom
X16  332-02  [332-02]  131.47,25.17 90 bottom
X17  332-02  [332-02]  280.21,31.9 180 top
X18  332-02  [332-02]  280.21,49.68 180 top
X19  332-02  [332-02]  77.62,25.22 90 bottom
X20  [GHI2_USB_HOST_HORIZONTAL_W/CHASSIS_GND]  226.06,35.56 270 top

## Library data of the parts
0_6 10VA 12VD A1 AGND5 AUDIO_OUT_L_POSTVOL AUDIO_OUT_R_POSTVOL CP1-CP4 DGND DGND1 G1 JP12 JP13 KNOB1 KNOB2 R1 R24-R27 R45-R47 R51-R57 SC SD ST1-ST4 VT1-VT4 = adafruit; PARTNO: *DNP
C1 C2 C8 C12-C18 C34 C57 C58 = adafruit; PARTNO: CC0603KRX7R8BB103
C3 C61 = adafruit; PARTNO: CC0603KRX7R9BB222
C5 C7 C27 C49 C85-C87 = rcl; PARTNO: CC0603KRX7R8BB104
C6 C35 C37 C59 C60 = adafruit; PARTNO: CC0603KRX7R8BB104
C38 C39 C48 C51 C53 C56 = rcl; PARTNO: UMK107BJ105KA-T
C52 = rcl; PARTNO: TMK316F106ZL-T
C55 = rcl; PARTNO: CC0603JRNPO8BN102
C66 = adafruit; PARTNO: EEE-1VA470P
C70 = adafruit; PARTNO: UUQ1E101MCL1GS
CV_PEDAL JP31 JP35 JP37 VBUS = pinhead; PARTNO: *DNP
D1-D3 D9 = diode; PARTNO: BAT54S-HF
D4-D8 D10-D13 = SparkFun-LED; PARTNO: IN-S124BRA
D20 = diode; PARTNO: SS34
IC2 = 40xx; PARTNO: MC74HC4052ADR2G
IC3 IC5 = linear; PARTNO: NCV20091SN3T1G
IC6 = linear; PARTNO: LM324DR
IC18 = custom; PARTNO: CY8C4124PVI-432
J1 = 105162-0001; AVAILABILITY: In Stock; DESCRIPTION: 9 (8 + 1) Position Card Connector Secure Digital - microSD™ Surface Mount, Right Angle Gold; MF: Molex; MP: 1051620001; PACKAGE: None; PARTNO: 1051620001; PRICE: None; PURCHASE-URL: https://pricing.snapeda.com/search/part/1051620001/?ref=eda
J28 = PJ-066A; MANUFACTURER: CUI INC; PARTNO: PJ-066A; PARTREV: 1.02; STANDARD: Manufacturer recommendations
JP1 JP2 JP15 = pinhead; PARTNO: SBH11-PBPC-D08-ST-BK
JP3-JP5 JP7 JP17-JP19 = Connector; CATEGORY: CONNECTOR; PARTNO: 3020-10-0100-00; SUB-CATEGORY: PIN-HEADER
JP6 JP8-JP10 JP20 JP21 JP23 JP24 JP34 = custom; PARTNO: 3221-10-0300-00
JP11 JP22 = Connector; CATEGORY: CONNECTOR; PARTNO: *DNP; SUB-CATEGORY: PIN-HEADER
L5 = rcl; PARTNO: RLB9012-100KL
Q1 = transistor-power; PARTNO: DMP3125L-7
R2 R3 R5-R7 R9 R38-R40 R60-R64 = rcl; PARTNO: RC0603JR-0747RL; SPICEPREFIX: R
R4 R19 R192-R194 R199 = Resistor; PARTNO: ESR03EZPF1002
R8 R10-R12 R15-R18 R20 R22 R23 R50 R103 R127 = adafruit; PARTNO: CRCW06030000Z0EAHP
R13 = rcl; PARTNO: ESR03EZPJ333
R14 = rcl; PARTNO: CRCW060368K0FKEAHP
R21 R32 R41 R48 R49 R65 = adafruit; PARTNO: ESR03EZPJ152
R28 R29 R34 R36 R37 R58 R79 R82 R85 R86 = adafruit; PARTNO: ESR03EZPF1002
R30 R31 R33 = adafruit; PARTNO: RC0603JR-0747RL
R35 R59 R66 R67 = adafruit; PARTNO: ESR03EZPJ101
R42-R44 R118 R119 R123-R125 = adafruit; PARTNO: RC0603JR-0782RL
R80 R81 R83 R84 = adafruit; PARTNO: ESR03EZPF2002
R137 = Resistor; PARTNO: ESR03EZPF5600
S1 S3 = Wurth_Switch_WS-SLTV; DATASHEET-URL: https://www.we-online.com/catalog/datasheet/452404020202.pdf; PACKAGING: Bulk; PART-NUMBER: 452404020202; PARTNO: 452404020202; QTY: 200
S2 S4 S8 S10 S11 = SparkFun-Switches; PARTNO: TL1105SPF160Q; PROD_ID: SWCH-08441; SF_SKU: COM-00097
U1 U7 = Electrosmith_Boards; PARTNO: *DNP
U2 = LP2985; PARTNO: LP2985-10DBVR
U3-U6 = SparkFun-Sensors; PARTNO: QRE1113GR; PROD_ID: IC-09357; SF_ID: COM-09542
U$1 U$5 U$11-U$14 U$18-U$20 = manta_rev3_5; PARTNO: *DNP
U$2 = custom; PARTNO: P0925N-FA15AR100K
U$7 = CY8KIT-059; PARTNO: *DNP
U$15 U$16 U$68 U$69 = custom; PARTNO: *DNP
VR1 VR2 = SparkFun-Resistors; PARTNO: P0915N-FC15BR100K; PROD_ID: RES-09177; SF_SKU: COM-09288
X1 X9-X15 = CYCFI_Con; PARTNO: *DNP
X2 X3 = custom; PARTNO: NRJ6HM-1
X4 = SparkFun-Connectors; PARTNO: PRT-00139
X5-X8 X16-X19 = con-garry; PARTNO: *DNP
X20 = BeagleBone_Blue_R3; PARTNO: 292303-1

## Nets
1.5V_MID: C7.1 C49.2 IC5.4 IC6.3 IC6.5 IC6.10 IC6.12 R21.1
3V3A1: C5.1 C6.1 C59.1 C60.1 D1.2 D2.2 D3.2 D9.2 IC2.16 IC3.5 IC5.5 JP4.1 JP4.7 JP5.7 JP12.1 JP13.1 R4.1 R46.1 R194.2 U1.21 U1.B21
3V3D3: JP10.5 JP10.6 JP11.3
3V3D5: C86.1 IC18.27 JP6.5 JP6.6 JP34.1
3V3FORPEDAL: JP1.7 R33.2
12VD1: 12VD.1 C66.+ L5.2 Q1.3 U1.39 U1.B39 U7.39 U7.B39
12VD2: D20.C JP15.14 JP15.16
12VIN: C70.+ JP1.14 JP1.16 L5.1
+3V3: J1.4 JP8.5 JP8.6 JP9.5 JP9.6 JP23.5 JP23.6 JP35.3 R32.1 R41.1 R48.2 R49.2 U1.38 U1.B38 U$7.26 U$7.27
+10V: 10VA.1 C49.1 C52.1 C53.1 C55.1 IC6.4 JP18.7 JP18.9 U2.5
ADC1_1: C8.1 D1.3 IC6.1 R53.2 R81.2 U1.22 U1.B22
ADC1_2: R53.1 U7.22 U7.B22
ADC2_1: C12.1 D9.3 IC6.7 R51.2 R80.2 U1.23 U1.B23
ADC2_2: R51.1 U7.23 U7.B23
ADC3_1: C13.1 D2.3 IC6.8 R54.2 R83.2 U1.24 U1.B24
ADC3_2: R54.1 U7.24 U7.B24
ADC4_1: C14.1 D3.3 IC6.14 R52.2 R84.2 U1.25 U1.B25
ADC4_2: R52.1 U7.25 U7.B25
ADC5_1: C15.1 JP5.1 R24.1 U1.26 U1.B26
ADC5_2: R24.2 U7.26 U7.B26
ADC6_1: C16.1 JP5.2 R25.2 U1.27 U1.B27
ADC6_2: R25.1 U7.27 U7.B27
ADC7_1: C17.1 JP5.3 R26.1 U1.28 U1.B28
ADC7_2: R26.2 U7.28 U7.B28
ADC8_1: C18.1 JP5.4 R27.2 U1.29 U1.B29
ADC8_2: R27.1 U7.29 U7.B29
AGND: AGND5.1 C1.2 C2.2 C5.2 C6.2 C7.2 C8.2 C12.2 C13.2 C14.2 C15.2 C16.2 C17.2 C18.2 C34.2 C51.2 C52.2 C53.2 C55.2 C57.2 C58.2 C59.2 C60.2 D1.1 D2.1 D3.1 D9.1 IC2.7 IC3.2 IC5.2 IC6.11 JP1.4 JP1.6 JP1.8 JP4.5 JP4.10 JP5.8 JP12.3 JP13.3 JP18.8 JP18.10 Q1.1 R19.2 R50.2 R192.1 R199.1 S1.1 S1.4 U1.20 U1.B20 U2.2 U7.20 U7.B20
AGND3: G1.1 JP15.4 JP15.6 JP15.8 X2.S X3.S
AUDIOOUTL: AUDIO_OUT_L_POSTVOL.1 JP4.6 R28.1 R30.1
AUDIOOUTR: AUDIO_OUT_R_POSTVOL.1 R29.1 R31.1 S1.2 S1.5
AUDIOOUTR_PRESWITCH: JP4.8 S1.3 S1.6
BLUE_LED: U$7.2
BYPASS: C2.1 U2.4
CAP_0_0: R11.1 ST1.1 U$7.1
CAP_0_1: R12.1 ST2.1 U$7.3
CAP_0_2: R15.1 ST3.1 U$7.5
CAP_0_3: R16.1 ST4.1 U$7.7
CAP_1_0: CP1.1 R22.2 U$7.51
CAP_1_1: CP2.1 R20.2 U$7.48
CAP_1_2: CP3.1 R18.2 U$7.46
CAP_1_3: CP4.1 R17.2 U$7.44
CGND: JP7.8 U3.2 U3.4 U4.2 U4.4 U5.2 U5.4 U6.2 U6.4
CLK: J1.5 R5.2
CMD: J1.3 R3.2
CMOD_CH1: C61.1 U$7.21
CV_PEDAL: CV_PEDAL.1 JP1.5 U$7.47
CV_PEDAL_SENSE: R103.2 U$7.49
DAISY_D+: R45.1 U7.37 U7.B37
DAISY_D-: R47.1 U7.36 U7.B36
DAT0: J1.7 R6.2
DAT1: J1.8 R7.2
DAT2: J1.1 R9.2
DAT3: J1.2 R2.2
DGND: C27.2 C61.2 C66.- C70.- DGND1.1 DGND.1 IC2.8 IC2.13 J1.6 J1.10 J1.11 J1.12 J1.13 JP1.9 JP1.10 JP1.12 JP8.1 JP8.2 JP9.1 JP9.2 JP22.4 JP23.1 JP23.2 JP35.4 R8.2 R14.1 R50.1 U1.40 U1.B40 U7.40 U7.B40 U$7.25 U$7.28 U$7.52 X20.4
DGND3: J28.2 JP15.9 JP15.10 JP15.12 JP37.1 R127.2 X4.GND
DM: JP1.13 JP22.2 R47.2 X20.2
DOWN: JP9.3 U$7.40
DP: JP1.15 JP22.3 R45.2 X20.3
EDIT: JP9.8 U$7.41
EGND: C3.2 C85.2 C86.2 C87.2 D4.C D5.C D6.C D7.C D8.C D10.C D11.C D12.C IC18.28 JP6.1 JP6.2 JP34.3 JP34.5 JP34.7 JP34.9
EXT_MUX_EN: IC2.6 U$7.38
EXT_MUX_S0: IC2.10 U$7.43
EXT_MUX_S1: IC2.9 U$7.42
EXTRA_GPIO: 0_6.1 U$7.31
FR_3V3: JP24.5 JP24.6
FR_GND: JP24.1 JP24.2 R137.2 S2.3 S4.3
FR_LATCHING: JP24.3 S4.1
FR_MOMENTARY: JP24.4 S2.1
FRETTED_LATCHING: JP23.3 U$7.13
FRETTED_MOMENTARY: JP23.4 U$7.14
IDAC_OUT: R10.1 U$7.30
JOY_X: C58.1 JP13.2 U$7.6
JOY_Y: C57.1 JP12.2 U$7.4
KNOB1_HIGH: C35.1 C37.1 JP3.1 JP3.7 VR1.P$1 VR2.P$1
KNOB_1: C1.1 JP4.3 KNOB1.1 U$7.36
KNOB_2: C34.1 JP4.9 KNOB2.1 U$7.45
LED_1: JP23.10 U$7.35
LOUT_2: JP4.4 U7.18 U7.B18
MISO_1: R56.2 R63.2 U$7.24
MISO_1_P: R63.1 U1.10 U1.B10
MISO_2: R56.1 R64.2 U$7.8
MISO_2_P: R64.1 U7.10 U7.B10
MOSI_1: R57.2 R60.2 U1.11 U1.B11
MOSI_1_P: R60.1 U$7.10
MOSI_2: R57.1 R62.2 U7.11 U7.B11
MOSI_2_P: R62.1 U$7.12
N$1: JP1.3 R103.1
N$2: D4.A R118.2
N$3: R29.2 S3.1
N$4: R28.2 S3.4
N$5: JP1.1 S3.2
N$6: JP1.2 S3.5
N$7: U1.33 U1.B33 U7.33 U7.B33
N$8: U1.34 U1.B34 U7.34 U7.B34
N$9: R31.2 S3.3
N$10: R30.2 S3.6
N$11: IC3.4 R33.1 R193.1
N$12: D5.A R119.2
N$13: D6.A R123.2
N$14: D7.A R124.2
N$15: D8.A R125.2
N$16: D10.A R42.2
N$17: JP22.5 R8.1
N$18: D11.A R43.2
N$19: C38.2 R82.2
N$20: R35.2 U3.1
N$21: R59.2 U4.1
N$22: C39.2 R79.1
N$23: R66.2 U5.1
N$24: R67.2 U6.1
N$25: JP3.3 VR1.P$2
N$26: JP3.4 U$2.P$5
N$27: JP3.6 U$2.P$4
N$28: C48.2 R85.2
N$29: C56.2 R86.2
N$30: IC6.2 R81.1 R82.1
N$31: JP3.9 VR2.P$2
N$32: D12.A R44.2
N$33: IC6.6 R79.2 R80.1
N$34: IC6.13 R84.1 R86.1
N$35: IC6.9 R83.1 R85.1
N$36: IC5.3 R21.2
N$37: IC5.1 R4.2 R19.1
N$38: IC18.8 R44.1
N$39: IC18.7 R43.1
N$40: IC18.6 R42.1
N$41: IC18.15 U$20.P$2
N$42: IC18.19 U$14.P$2
N$43: IC18.20 U$13.P$2
N$44: IC18.21 U$12.P$2
N$45: R46.2 U7.21 U7.B21
N$46: IC18.22 U$11.P$2
N$47: D13.A JP24.10
N$48: D13.C R137.1
N$49: IC18.24 U$1.P$2
N$50: IC18.16 U$19.P$2
N$51: IC18.23 U$5.P$2
N$52: JP3.8 U$2.P$7
N$53: JP3.2 U$2.P$8
N$54: A1.1 JP15.2 X2.T
N$55: JP15.5 X3.R
N$56: JP15.7 X3.T
N$57: JP15.15 JP37.3 X4.D+
N$58: JP15.13 JP37.2 X4.D-
N$59: JP15.11 JP37.4 X4.VBUS
N$60: D20.A J28.1
N$61: JP15.1 X2.R
N$62: JP7.6
N$63: JP7.5
N$101: C51.1 Q1.2 U2.1 U2.3
N$122: JP15.3 X3.SN
N$148: IC18.18 U$18.P$2
N$151: C85.1 IC18.26
N$152: IC18.1 R118.1
N$153: C3.1 IC18.17
N$154: IC18.2 R119.1
N$155: IC18.3 R123.1
N$156: IC18.4 R124.1
N$162: IC18.5 R125.1
N$185: R127.1 X4.S1 X4.S2
N$261: IC3.3 R192.2 R193.2
N$268: IC3.1 R194.1 R199.2
O_CB1: JP10.8 S8.3
O_CB2: JP10.10 S10.3
O_CB3: JP10.3 S11.3
O_GND: JP10.1 JP10.2 JP11.4 S8.1 S10.1 S11.1
O_SCL: JP10.9 JP11.2
O_SDA: JP10.7 JP11.1
OPT1: JP7.1 R34.2 U3.3
OPT2: JP7.2 R36.2 U4.3
OPT3: JP7.3 R37.2 U5.3
OPT4: JP7.4 R58.2 U6.3
OPT_PWR: JP7.7 R34.1 R35.1 R36.1 R37.1 R58.1 R59.1 R66.1 R67.1
OUTGND: C35.2 C37.2 JP3.5 JP3.10 U$2.P$3 U$2.P$6 VR1.P$3 VR2.P$3
PA0_VBUS: R23.1 U7.32 U7.B32
PA1_SD_DETECT: J1.9 U7.31 U7.B31
PICKUP1: C38.1 JP18.1
PICKUP1_OUT: JP19.1 X16.1
PICKUP1_OUT2: JP17.1 X5.1
PICKUP2: C39.1 JP18.2
PICKUP2_OUT: JP19.2 JP21.9 JP21.10
PICKUP2_OUT2: JP17.2 X6.1
PICKUP2_OUT_HIGH: JP20.9 JP20.10 X17.1
PICKUP3: C48.1 JP18.3
PICKUP3_OUT: JP19.3 JP21.7 JP21.8
PICKUP3_OUT2: JP17.3 X7.1
PICKUP3_OUT_HIGH: JP20.7 JP20.8 X18.1
PICKUP4: C56.1 JP18.4
PICKUP4_OUT: JP19.4 X19.1
PICKUP4_OUT2: JP17.4 X8.1
PICKUP_GND1: JP19.8 JP19.10 JP21.1 JP21.2 JP21.3 JP21.4 X1.P$1 X1.P$2 X15.P$1 X15.P$2 X16.2 X19.2
PICKUP_GND1_HIGH: JP20.1 JP20.2 JP20.3 JP20.4 X13.P$1 X13.P$2 X14.P$1 X14.P$2 X17.2 X18.2
PICKUP_GND2: JP17.8 JP17.10 X5.2 X6.2 X7.2 X8.2 X9.P$1 X9.P$2 X10.P$1 X10.P$2 X11.P$1 X11.P$2 X12.P$1 X12.P$2
PICKUP_PWR1: JP19.7 JP19.9 JP21.5 JP21.6 X1.P$3 X15.P$3
PICKUP_PWR1_HIGH: JP20.5 JP20.6 X13.P$3 X14.P$3
PICKUP_PWR2: JP17.7 JP17.9 X9.P$3 X10.P$3 X11.P$3 X12.P$3
ROUT_2: JP4.2 U7.19 U7.B19
SCL: JP8.9 JP9.9 JP23.9 JP31.1 JP35.1 R48.1 U$7.16
SCL_1: JP24.9 SC.1
SCL_GN: R41.2 U1.12 U1.B12 U7.12 U7.B12
SCLK_1: R40.2 R55.2 U1.9 U1.B9
SCLK_1_P: R40.1 U$7.23
SCLK_2: R55.1 R61.2 U7.9 U7.B9
SCLK_2_P: R61.1 U$7.11
SD_CLK: R5.1 U7.7 U7.B7
SD_CMD: R3.1 U7.6 U7.B6
SD_DAT0: R6.1 U7.5 U7.B5
SD_DAT1: R7.1 U7.4 U7.B4
SD_DAT2: R9.1 U7.3 U7.B3
SD_DAT3: R2.1 U7.2 U7.B2
SDA: JP8.7 JP9.7 JP23.7 JP31.2 JP35.2 R49.1 U$7.15
SDA_1: JP24.7 SD.1
SDA_GN: R32.2 U1.13 U1.B13 U7.13 U7.B13
SLIDER_SCL: IC18.11 JP6.9
SLIDER_SDA: IC18.12 JP6.7
SS_1: R1.2 R39.2 U1.8 U1.B8
SS_1_P: R39.1 U$7.22
SS_2: R1.1 R38.2 U7.8 U7.B8
SS_2_P: R38.1 U$7.19
STRING1_BODY: R11.2 U$16.P$1
STRING1_NECK: IC2.12 JP2.15 R22.1
STRING2_BODY: R12.2 U$15.P$1
STRING2_NECK: IC2.14 JP2.11 R20.1
STRING3_BODY: R15.2 U$68.P$1
STRING3_NECK: IC2.15 JP2.5 R18.1
STRING4_BODY: R16.2 U$69.P$1
STRING4_NECK: IC2.11 JP2.1 R17.1
SWD_CLK_SLIDER: IC18.14 JP34.4
SWD_IO_SLIDER: IC18.13 JP34.2
SWO_SLIDER: JP34.6
UP: JP9.10 U$7.50
V_H: R10.2 R65.1 U$7.33
V_T: IC2.3 R65.2 U$7.32 U$7.37
V_T_1: IC2.1 JP2.16 VT1.1
V_T_2: IC2.5 JP2.14 VT2.1
V_T_3: IC2.2 JP2.4 VT3.1
V_T_4: IC2.4 JP2.2 VT4.1
VBUS: JP1.11 R13.2 VBUS.1
VBUS_DIVIDED: C27.1 R13.1 R14.2 R23.2 U$7.9
XRES_SLIDER: C87.1 IC18.25 JP34.10